# Altium PCB PCB.PcbDoc
Units mm, origin at the board's own origin, x right, y up, seen from the top; angles counter-clockwise.
Board outline 33 x 29 mm, 2 copper layers (Component Side, Bottom Layer), stack 0.325 mm thick; 16 components, 19 nets, 68 pads, 24 vias.
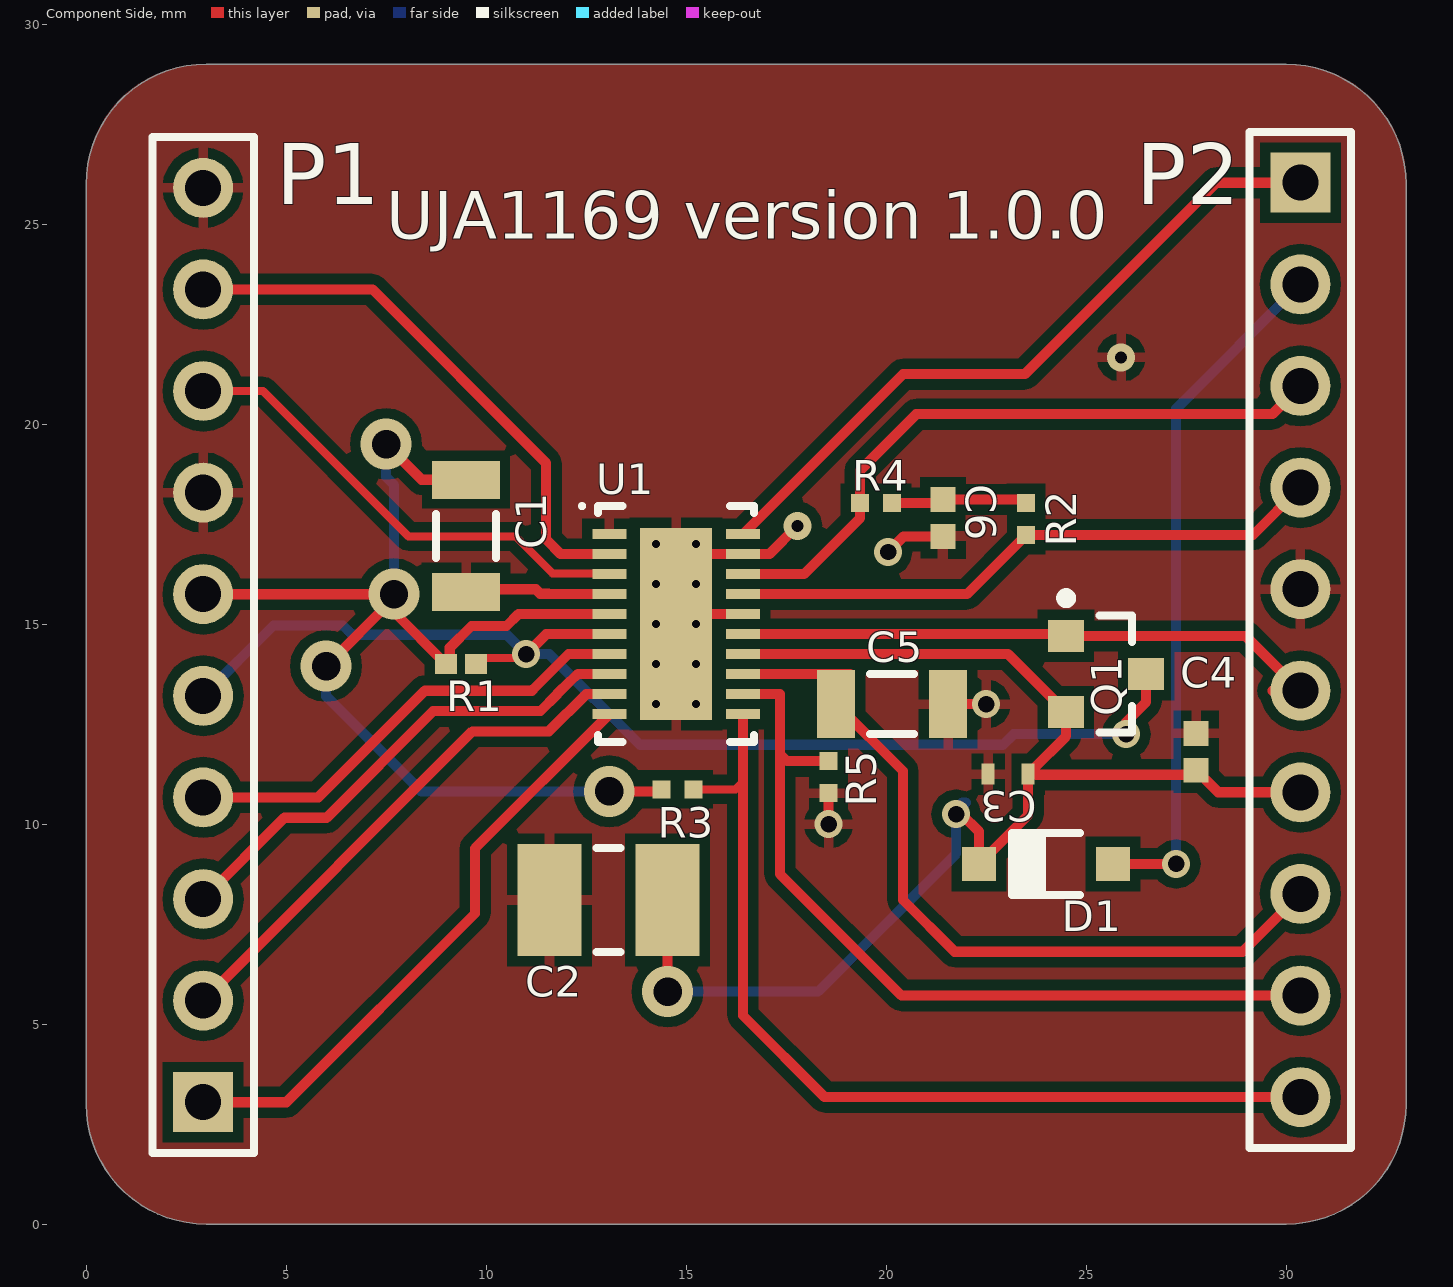
[diagram p0: Component Side view]
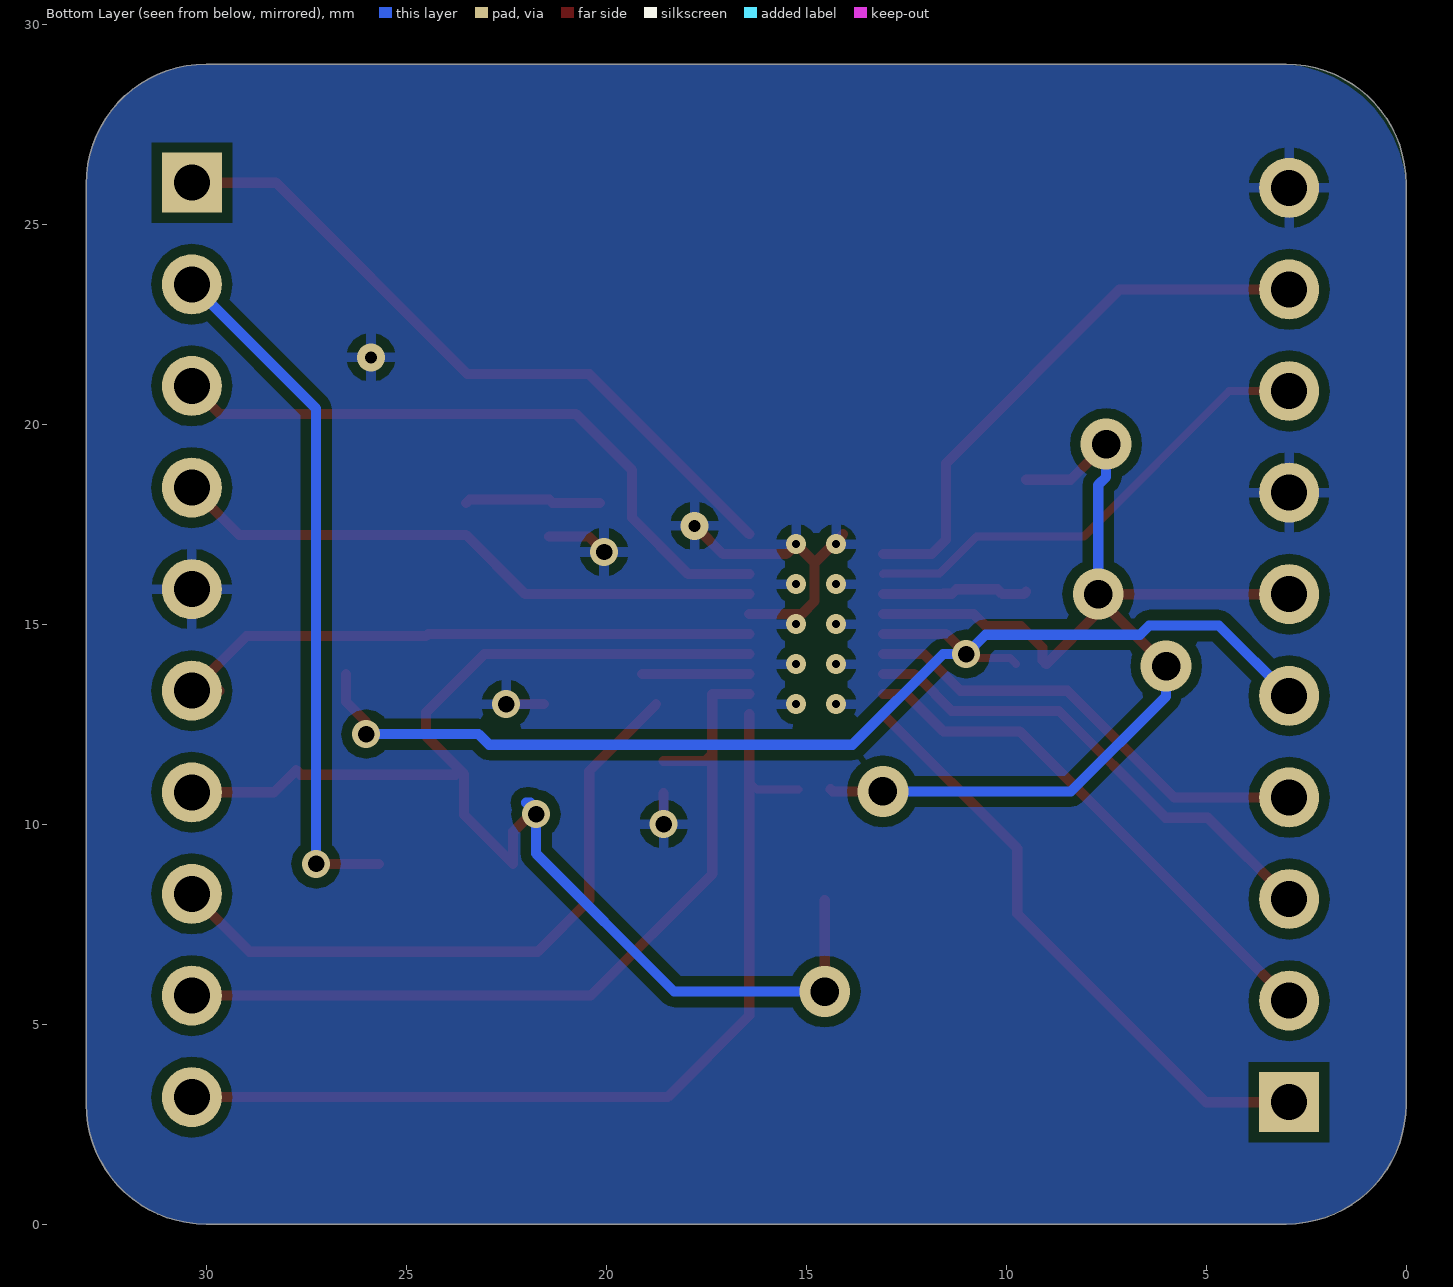
[diagram p1: Bottom Layer view, seen from below]

## Layer stack, top to bottom
Top Solder: solder mask 0.0102, Solder Resist, Dk 3.5
Component Side: signal copper 0.0356
Dielectric 1: core 0.254, FR-4, Dk 4.2
Bottom Layer: signal copper 0.0356
Solder Side: solder mask 0.0102, Solder Resist, Dk 3.5

## Board outline
0,26 cw(c3,26) 3,29 30,29 cw(c30,26) 33,26 33,3 cw(c30,3) 30,0 3,0 cw(c3,3) 0,3

## Design rules (kind name [scope] priority, off if disabled: settings)
Clearance [All] p1: gap=0.254 ignorepadtopadclearanceinfootprint=FALSE except(0: Arc-Hole Track-Hole SMDPad-Hole THPad-Hole Via-Hole Fill-Hole Poly-Hole Region-Hole Text-Hole; 0.16: Arc-Arc Arc-Track Arc-SMDPad Track-Track Track-SMDPad SMDPad-SMDPad)
PolygonConnect [All] p1: connectstyle=Relief reliefconductorwidth=0.254 reliefentries=4 polygonreliefangle="90 Angle" airgapwidth=0.254
RoutingVias [All] p1: holewidth=0.711 width=1.27 viastyle="Through Hole" minholewidth=0.711 minwidth=1.27 maxholewidth=0.711 maxwidth=1.27
SolderMaskExpansion [All] p1: expansion=0.102
Width [All] p1: maxlimit=0.254 minlimit=0.2 preferedwidth=0.254 minimp=50.000000 maximp=50.000000 favimp=50.000000
30 further rules are at their usual default settings.

## Components (designator, comment, footprint, x,y, rotation, side; value= is the part's Value field where it differs from the comment)
C1 "10uF" CAPC1206(3216)130_L 9.5,17.208 r90 top
C2 "22uF" CAPC1210(3225)220_M 13.061,8.101 r0 top
C3 "100 nF" CAPC1005X55X10LL05 23.05,11.25 r180 top
C4 "10nF" CAPC1005X55X25NL05T05 27.75,11.808 r90 top
C5 "10uF" CAPC1206(3216)130_L 20.15,13 r0 top
C6 "4700pF" CAPC1005X55X25NL05T05 21.423,17.654 r270 top
D1 "S1GFL" VISH-SOD-123-2_V 24,9.005 r180 top
P1 "Header 10" HDR1X10 2.925,3.048 r90 top
P2 "Header 10" HDR1X10 30.357,26.035 r270 top
Q1 "PnP" ONSC-SOT-23-3-318-08_V 25.5,13.75 r0 top
R1 "2.2 Ohms" RESC1005X40X25LL10T10 9.373,14 r180 top
R2 "60.4 Ohms" RESC1005X40X25LL05T05 23.5,17.629 r90 top
R3 "4.7k DNP" RESC1005X40X25LL05T05 14.787,10.871 r180 top
R4 "60.4 ohms" RESC1005X40X25LL05T05 19.75,18.026 r0 top
R5 "10 kOhms" RESC1005X40X20LL05T10 18.562,11.176 r270 top
U1 "UJA1169" UJA1169_IPCcompliant 14.75,15 r0 top

## Footprints (in the part's own frame and the unit in brackets; to place one, negate y for a bottom-side part, rotate by r counter-clockwise, add the part's x,y. Pads: shape width x height; smd on the part's side, far side on the other; paste and mask are expansions set on the pad)
CAPC1005X55X10LL05 [mm] "Chip Capacitor, 2-Leads, Body 1.05x0.55mm, IPC High Density"
  rect 0.32x0.52 smd: 1(-0.5,0) 2(0.5,0)
  body extent -0.53,-0.28 0.53,0.28, height 0.55
CAPC1005X55X25NL05T05 [mm] "Chip Capacitor, 2-Leads, Body 1.00x0.50mm, IPC Medium Density"
  rect 0.62x0.62 smd: 1(-0.46,0) 2(0.46,0)
  body extent -0.53,-0.28 0.53,0.27, height 0.55
CAPC1206(3216)130_L [mm] "Chip Capacitor, Body 3.2x1.6mm, Height 1.3mm, IPC High Density"
  rect 0.95x1.7 smd: 1(-1.4,0) 2(1.4,0)
  silkscreen extent -0.55,-0.75 0.55,0.75, body extent -1.7,-0.9 1.7,0.9, height 1.3
CAPC1210(3225)220_M [mm] "Chip Capacitor, Body 3.2x2.5mm, Height 2.2mm, IPC Low Density"
  rect 1.6x2.8 smd: 1(-1.475,0) 2(1.475,0)
  silkscreen extent -0.3,-1.3 0.3,1.3, body extent -1.7,-1.35 1.7,1.35, height 2.2
HDR1X10 [mm] "Connector; Header; 10 Position"
  rect 1.5x1.5 hole 0.9: 1(0,0)
  round 1.5 hole 0.9: 2(2.54,0) 3(5.08,0) 4(7.62,0) 5(10.16,0) 6(12.7,0) 7(15.24,0) 8(17.78,0) 9(20.32,0) 10(22.86,0)
  silkscreen extent -1.27,-1.27 24.13,1.27
ONSC-SOT-23-3-318-08_V [mm] "SOT23, 3-Leads, Body 2.92x1.3mm, Pitch 0.95mm"
  rect 0.9x0.8 smd: 1(-1,0.95) 2(-1,-0.95) 3(1,0)
  silkscreen extent -1.12,-1.46 0.65,2.02, body extent -0.65,-1.46 0.65,1.46, height 1.11
RESC1005X40X20LL05T10 [mm] "Chip Resistor, 2-Leads, Body 1.00x0.50mm, IPC High Density"
  rect 0.45x0.45 smd: 1(-0.4,0) 2(0.4,0)
  body extent -0.53,-0.27 0.53,0.28, height 0.4
RESC1005X40X25LL05T05 [mm] "Chip Resistor, 2-Leads, Body 1.00x0.50mm, IPC High Density"
  rect 0.45x0.45 smd: 1(-0.4,0) 2(0.4,0)
  body extent -0.53,-0.27 0.53,0.28, height 0.4
RESC1005X40X25LL10T10 [mm] "Chip Resistor, 2-Leads, Body 1.00x0.50mm, IPC High Density"
  rect 0.55x0.5 smd: 1(-0.375,0) 2(0.375,0)
  body extent -0.55,-0.3 0.55,0.3, height 0.4
UJA1169_IPCcompliant [mm] "SON, 20-Leads, Body 5.50x3.50mm, Pitch 0.50mm, Thermal Pad 4.80x1.80mm, IPC Medium Density"
  rect 0.85x0.25 smd: 1(-1.67,2.25) 2(-1.67,1.75) 3(-1.67,1.25) 4(-1.67,0.75) 5(-1.67,0.25) 6(-1.67,-0.25) 7(-1.67,-0.75) 8(-1.67,-1.25) 9(-1.67,-1.75) 10(-1.67,-2.25) 11(1.67,-2.25) 12(1.67,-1.75) 13(1.67,-1.25) 14(1.67,-0.75) 15(1.67,-0.25) 16(1.67,0.25) 17(1.67,0.75) 18(1.67,1.25) 19(1.67,1.75) 20(1.67,2.25)
  rect 1.8x4.8 smd: 21(0,0)
  silkscreen extent -2.4,-2.95 1.95,3, body extent -1.8,-2.8 1.8,2.8, height 1
VISH-SOD-123-2_V [mm] "SMD, 2-Leads, Body 2.7x1.55mm, Height 1.35mm"
  rect 0.85x0.85 smd: 1(-1.675,0) 2(1.675,0)
  silkscreen extent -0.85,-0.77 0.85,0.78, body extent -1.35,-0.77 1.35,0.77, height 1.35

## Part data
C1: library part CMP-1037-04970-1, "C1206X106K8RACAUTO & JMK316BJ106KLHT - Thickness 10V -20% to +80% 1206 SMD", Case-EIA=1206, Case-Metric=3216, Rated Voltage="10 V", Tolerance="-20% to +80%", Max Thickness="1.3 mm", Technology=SMT
C2: library part CMP-1038-02286-1, "GCJ32ER71C226KE01L - CAP 22uF 25V -20% to +80% 1210 (3225 Metric) Thickness 2.2mm SMD", Case-EIA=1210, Case-Metric=3225, Rated Voltage="25 V", Tolerance="-20% to +80%", Max Thickness="2.2 mm", Technology=SMT
C3: library part CMP-2000-05991-1, "AC0402KRX7R6BB104 - Multilayer Ceramic Capacitors MLCC - SMD/SMT 100 nF 10% 10V AEC-Q200", Capacitance=100pF, Manufacturer=TDK, Operating Temperature=-55°C~125°C, Package / Case=0402(1005Metric), Package Description="2-Pin Surface Mount Device, Body 1 x 0.5 mm", Package Reference=1005, PCN Part Number=MLCCPartNumberChange30/Nov/2012, Ratings=-, Standard Package=1, Temperature Coefficient=C0G,NP0, Tolerance=±5%, Voltage - Rated=50V, Applications=GeneralPurpose, Category=Capacitors, Datasheet URL=https://product.tdk.com/info/en/catalog/datasheets/mlcc_commercial_general_en.pdf, Datasheet Version=08/2016, Family=CeramicCapacitors, Features=-, Height - Seated (Max)=-, Kits=445-9021-KIT-ND-KITMLCC100PF-10UF04026.3-50V445-9013-KIT-ND-KITMLCC0.50PF-91PF040250V, Lead Spacing=-, Lead Style=-, Manufacturer URL=http://www.tdk.com/, Mounting Technology=SurfaceMount, Mounting Type=SurfaceMount,MLCC, Online Catalog=CSeries,GeneralPurpose, Other Names=445-1247-1, Packaging=CutTape(CT), Product Training Modules=CSeriesGeneralApplicationsSEAT,CCV,andTVCLDesignToolsGuidetoReplacinganElectrolyticCapacitorwithanMLCC, RoHS Information=RoHSCertificate-MLCC, Series=C
C4: library part CMP-2008-00001-1, "AC0402KRX7R8BB103 - 10000PF 25V X7R 0402", Manufacturer=Kemet, Part Number=CBR04C100J5GAC
C5: library part CMP-1037-04970-1, "C1206X106K8RACAUTO - Thickness 10V -20% to +80% 1206 SMD", Case-EIA=1206, Case-Metric=3216, Rated Voltage="10 V", Tolerance="-20% to +80%", Max Thickness="1.3 mm", Technology=SMT
C6: library part CMP-2008-00001-1, "0402YC472K4T4A", Manufacturer=Kemet, Part Number=CBR04C100J5GAC
D1: library part CMP-0931-00020-1, "S1GFL - Diode", Manufacturer="Vishay Semiconductor", Operating Temperature="-55 to 150 degC", PartNumber=MMSZ5232B-E3-08, Power Dissipation (mW)=500, Test Current (IZT1) (mA)=20, Tolerance="+/- 5%", Zener Voltage (NOM.) (V)=5.6, ComponentLink1Description="Manufacturer URL", ComponentLink1URL=http://www.vishay.com/, ComponentLink2Description=Datasheet, ComponentLink2URL=http://www.vishay.com/docs/85774/mmsz5225.pdf, ComponentLink3Description="Package Specification", ComponentLink3URL=http://www.vishay.com/docs/85774/mmsz5225.pdf, DatasheetVersion="Rev. 1.9", Int. Construction=Single, Mounting Technology="Surface Mount", PackageDescription="2-Pin SMD, Body 2.7 x 1.55 mm, Height 1.35 mm", PackageReference=SOD-123-2, PackageVersion="Rev. 1.9", Packing="Tape and Reel", RoHS=TRUE, Zener Impedance (IZT1) (Max.) (Ohm)=11
P1 P2: "Header, 10-Pin", LatestRevisionDate=17-Jul-2002, LatestRevisionNote="Re-released for DXP Platform.", Publisher="Altium Limited"
Q1: library part CMP-1048-00680-1, "NSV1C200LT1G - 100 V, 3 A, Low VCE(sat), PNP Transistor, 3-Pin SOT-23, Pb-Free, Tape and Reel", Manufacturer="On Semiconductor", PartNumber=NSV1C200LT1G, ComponentLink1Description="Manufacturer URL", ComponentLink1URL=http://www.onsemi.com/, ComponentLink2Description=Datasheet, ComponentLink2URL=http://www.onsemi.cn/pub_link/Collateral/NSS1C200L-D.PDF, ComponentLink3Description="Package Specification", ComponentLink3URL=http://www.onsemi.cn/pub_link/Collateral/318-08.PDF, DatasheetVersion="Rev. 2", IC Continuous (A)=-2, Mounting Technology="Surface Mount", Note1=0, PackageDescription="3-Pin Small Outline Transistor, Body 2.92 x 1.3 mm, Pitch 0.95 mm", PackageReference=SOT-23-3-318-08, PackageVersion="Rev. AP, 11/2009", Packing="Tape and Reel", Polarity=PNP, RoHS=TRUE
R1: library part CMP-2002-04163-1, "SG73P1ETTP2R20F", Manufacturer="KOA Speer", Part Number=SG73P1ETTP2R20F
R2 R4: library part CMP-2002-01013-1, "ERJ-2RKF60R4X", Manufacturer=Panasonic, Part Number=ERJ-2RKF60R4X
R3: library part CMP-2002-00001-1, "RK73H1ERTTP4701F", Manufacturer="Vishay Dale", Part Number=CRCW0402432RFKTD
R5: library part CMP-2002-01347-1, "RG1005P-103-D-T10", Manufacturer=Susumu, Part Number=RG1005P-103-D-T10

## Via types
v1: diameter 0.5, hole 0.2, Component Side to Bottom Layer, 10 vias
v2: diameter 0.7, hole 0.411, Component Side to Bottom Layer, 7 vias
v3: diameter 1.27, hole 0.711, Component Side to Bottom Layer, 5 vias
v4: diameter 0.7/0.7 (per signal layer), hole 0.3, Component Side to Bottom Layer, 2 vias

## Nets (pads, with @x,y where several pads share a name; then routed paths per layer and width w, separated by ;. In a path a pad name is that pad's centre, name@x,y a point inside that pad or via, vN(x,y) a via of type N, cw(c..) or ccw(c..) an arc to the next point about the centre after c; other vN are vias at no path point)
+5: C1.2 P1.6 R1.2 R3.2 U1.5 | length 30.2
  Component Side w0.254: P1.6 7.695,15.748 v3(7.697,15.75) 7.697,15.647 v3(6,13.95) ; v3(7.5,19.5) 8.392,18.608 C1.2 ; v3@7.697,15.301 R1.2 9.092,14.094 9.092,14.408 9.636,14.952 10.508,14.952 10.806,15.25 U1.5 ; v3(13.08,10.819) 14.335,10.819 R3.2
  Bottom Layer w0.254: v3(6,13.95) 6,13.197 8.378,10.819 v3(13.08,10.819) ; v3(7.5,19.5) 7.5,18.677 7.697,18.48 v3(7.697,15.75)
+12: D1.1 P2.2 | length 17.4
  Component Side w0.254: D1.1 v2(27.25,9.005) v2@27.274,9.005
  Bottom Layer w0.254: v2(27.25,9.005) 27.25,20.388 P2.2
GND: C1.1 C2.1 C3.2 C4.2 C5.2 C6.2 P1.7 P1.10 P2.5 R5.2 U1.1 U1.4 U1.16 U1.19 U1.21 | length 14.3
  Component Side w0.254: C1.1 9.558,15.75 10.095,15.75 10.215,15.87 11.241,15.87 11.353,15.758 11.557,15.758 11.565,15.75 U1.4 ; U1.21@14.074,17.25 U1.21@14.787,16.537 ; U1.16 15.113,15.25 14.787,15.576 U1.21@14.787,16.537 ; v4(17.785,17.457) 17.078,16.75 U1.19 15.5,16.75 v1(15.25,17) U1.21@14.787,16.537 ; v2(18.562,10) R5.2 ; v2(20.051,16.803) 20.442,17.194 C6.2 ; C5.2 v2(22.5,13)
  other v1: 14.25,13 15.25,13 14.25,14 15.25,14 14.25,15 15.25,15 14.25,16 15.25,16 14.25,17
  other v4: 25.878,21.671
NetC2_2: C2.2 C3.1 C4.1 D1.2 P2.7 Q1.2 U1.14 | length 34.2
  Component Side w0.254: v3@14.536,5.624 v3(14.536,5.814) C2.2 ; U1.14 23.05,14.25 Q1.2 24.5,12.2 C3.1@23.648,11.348 ; v2(21.75,10.25) 21.886,10.25 22.325,9.811 D1.2 23.55,10.23 C3.1 C3.1@23.648,11.348 ; P2.7 28.303,10.795 C4.1 27.636,11.234 23.761,11.234 C3.1@23.648,11.348
  Bottom Layer w0.254: v3(14.536,5.814) 18.301,5.814 21.75,9.263 v2(21.75,10.25) v2@21.75,10.283 ; v2@21.894,10.533 22,10.533
NetC5_1: C5.1 P2.8 U1.13 | length 19.3
  Component Side w0.254: U1.13 C5.1@19.101,13.75 ; C5.1 20.42,11.33 20.42,8.101 21.712,6.809 28.911,6.809 P2.8
NetC6_1: C6.1 R2.2 R4.2 | length 3.4
  Component Side w0.254: R4.2 21.335,18.026 C6.1 23.415,18.114 R2.2
NetP1_1: P1.1 U1.10 | length 15.1
  Component Side w0.254: P1.1 5.005,3.048 9.723,7.766 9.723,9.393 U1.10
NetP1_2: P1.2 U1.9 | length 13.3
  Component Side w0.254: P1.2 9.656,12.319 11.57,12.319 12.501,13.25 U1.9
NetP1_3: P1.3 U1.8 | length 12.5
  Component Side w0.254: P1.3 4.957,10.16 6.012,10.16 8.679,12.827 11.359,12.827 11.766,13.234 11.766,13.243 12.088,13.565 12.097,13.565 12.274,13.742 12.303,13.742 ; 12.303,13.75 U1.8
NetP1_4: P1.4 U1.7 | length 11.6
  Component Side w0.254: P1.4 5.801,10.668 8.468,13.335 11.141,13.335 11.258,13.452 11.258,13.454 12.046,14.242 12.056,14.242 ; 12.056,14.25 U1.7
NetP1_5: P1.5 Q1.3 R1.1 U1.6 | length 30.4
  Component Side w0.2: R1.1 9.898,14.15 v2@10.927,14.15
  Component Side w0.254: v2(11,14.25) 11.5,14.75 U1.6 ; v2(26,12.25) 26,12.552 26.5,13.052 Q1.3
  Bottom Layer w0.254: P1.5 4.683,14.966 6.421,14.966 6.653,14.734 10.516,14.734 v2(11,14.25) 11.58,14.25 13.846,11.984 22.921,11.984 23.187,12.25 v2(26,12.25)
NetP1_8: P1.8 U1.3 | length 12.1
  Component Side w0.2: P1.8 4.422,20.828 8.056,17.194 10.74,17.194 11.665,16.269 12.69,16.269 13.061,16.269 U1.3
NetP1_9: P1.9 U1.2 | length 14
  Component Side w0.254: P1.9 7.158,23.368 11.5,19.026 11.5,17.115 11.865,16.75 12.491,16.75 U1.2
NetP2_1: P2.1 U1.20 | length 17.6
  Component Side w0.254: U1.20 20.42,21.25 23.465,21.25 28.25,26.035 P2.1
NetP2_3: P2.3 R4.1 U1.18 | length 16.6
  Component Side w0.254: U1.18 17.946,16.25 19.35,17.654 R4.1 19.35,18.85 20.75,20.25 29.652,20.25 P2.3
NetP2_4: P2.4 R2.1 U1.17 | length 15
  Component Side w0.254: U1.17 22.021,15.75 R2.1 29.171,17.229 P2.4
NetP2_6: P2.6 Q1.1 U1.15 | length 15.2
  Component Side w0.254: U1.15 24.45,14.75 Q1.1 28.992,14.7 P2.6 P2.6@29.665,13.335
NetP2_9: P2.9 R5.1 U1.12 | length 21
  Component Side w0.254: U1.12 17.346,13.25 ; 17.346,13.242 17.346,11.75 ; R5.1 17.52,11.576 17.346,11.75 ; P2.9 20.381,5.715 17.346,8.75 17.346,11.75
NetP2_10: P2.10 R3.1 U1.11 | length 23.6
  Component Side w0.2: R3.1 16.234,10.871 16.42,11.057 ; 16.406,11.736 16.42,11.75
  Component Side w0.254: U1.11 16.42,11.75 16.42,11.057 16.42,5.217 18.462,3.175 P2.10

## Polygon pours and split planes (outlines as drawn)
no net on Drill Guide (solid, pour order 13): 31.25,0.75
GND on Component Side "Component Side-GND 1" (solid, pour order 14): 0,26.035 cw(c2.965,26.035) 2.965,29 30.035,29 cw(c30.035,26.035) 33,26.035 33,3 cw(c30,3) 30,0 3,0 cw(c3,3) 0,3
no net on Component Side "Component Side-No Net" (solid, pour order 11): 0,26.25
no net on Component Side "Component Side-No Net 1" (solid, pour order 10): 0,26.75
GND on Bottom Layer "Component Side-GND" (solid, pour order 12): 0,25.75 cw(c3.25,25.75) 3.25,29 30,29 cw(c30,26) 33,26 33,3 cw(c30,3) 30,0 3.048,0 cw(c3.048,3.048) 0,3.048

## Silkscreen, mask and mechanical layers (free items; w line width, h text height)
Top Overlay:
  text "UJA1169 version 1.0.0" at 7.5,24.25 h2.02